# Altium PCB 2Motor16servoV3.PcbDoc (part 3 of 3)
Units mil, origin at the board's own origin, x right, y up, seen from the top; angles counter-clockwise.
Board outline 6000 x 4000 mil, 2 copper layers (Top Layer, Bottom Layer); 79 components, 93 nets, 290 pads, 78 vias.
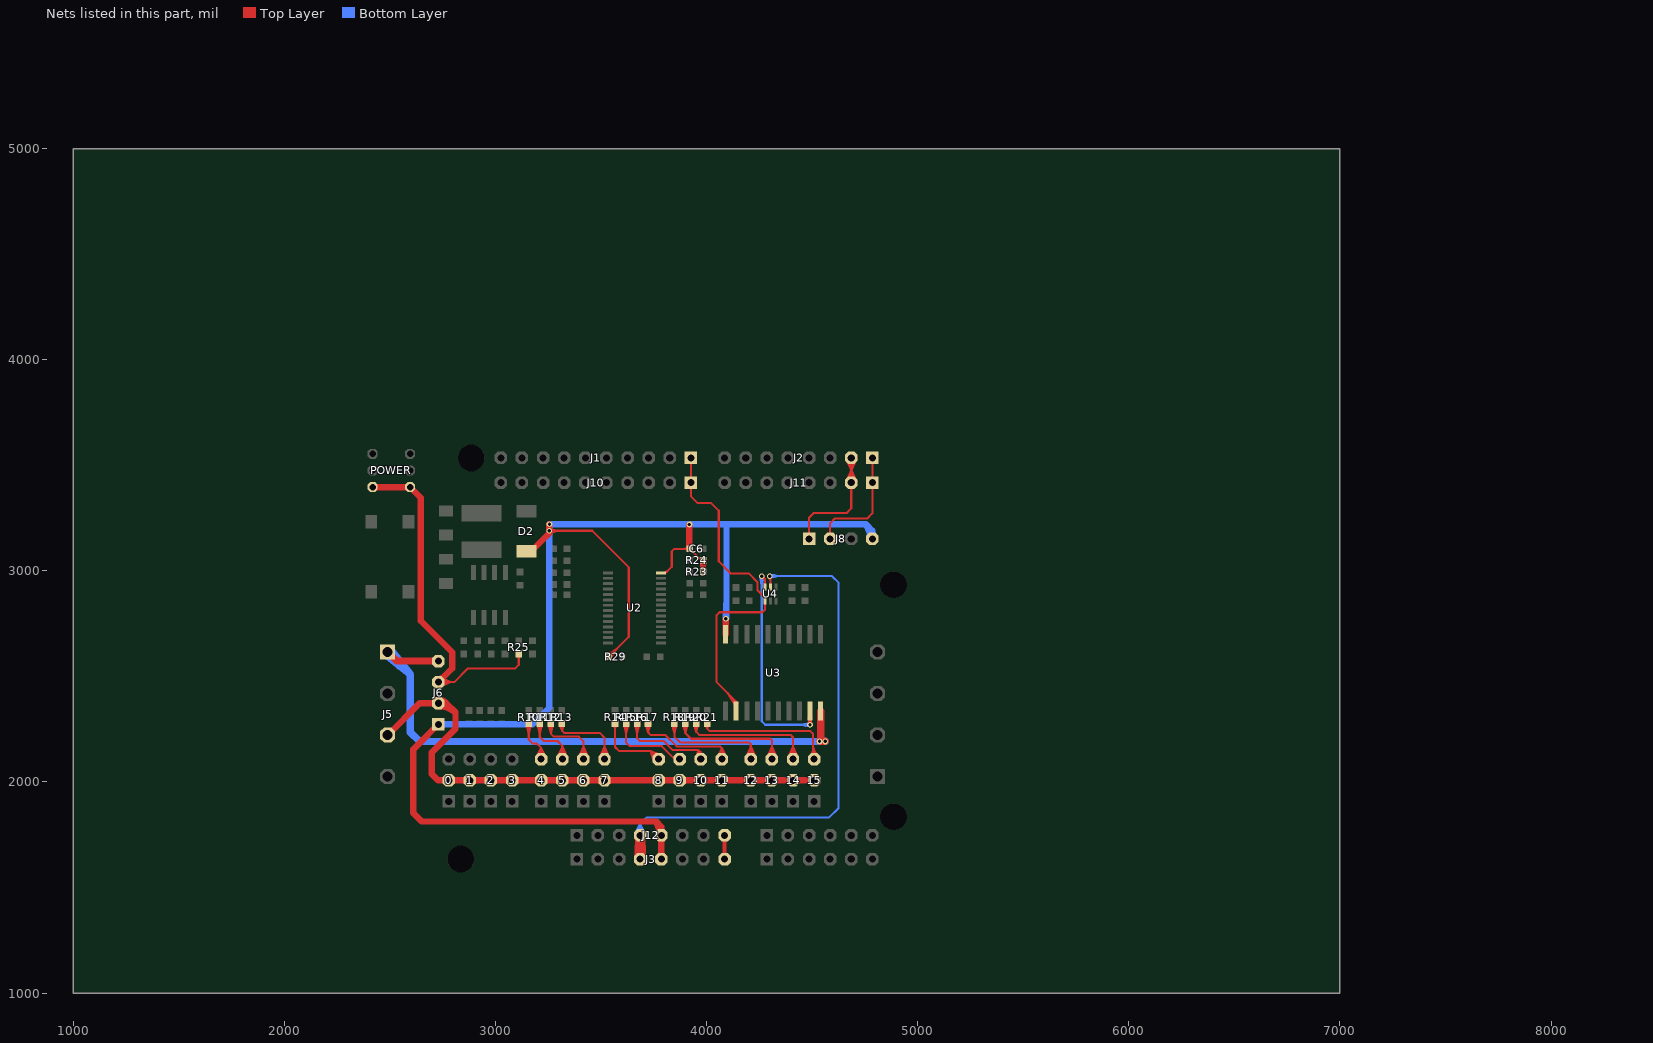
[diagram p3: the nets of this part, all layers, seen from the top]

## Via types
v1: diameter 23.62, hole 11.81, Top Layer to Bottom Layer, tented both sides, 50 vias
v2: diameter 27.56, hole 15.75, Top Layer to Bottom Layer, tented both sides, 28 vias

## Nets (pads, with @x,y where several pads share a name; then routed paths per layer and width w, separated by ;. In a path a pad name is that pad's centre, name@x,y a point inside that pad or via, vN(x,y) a via of type N, cw(c..) or ccw(c..) an arc to the next point about the centre after c; other vN are vias at no path point) (continued)
PWM4: 4.3 R10.2 | length 839.7
  Top Layer w10: R10.2@3146.33,2274.34 3157,2229.85 ; R10.2@3149.55,2260.91 cw(c3161.07,2263.68) R10.2@3157.24,2274.89 ; 3152.11,2250.23 cw(c3164.63,2253.24) R10.2@3160.47,2265.43 ; R10.2@3153.53,2265.43 cw(c3149.37,2253.24) 3161.89,2250.23 ; R10.2@3156.76,2274.89 cw(c3152.93,2263.68) R10.2@3164.45,2260.91 ; R10.2@3167.67,2274.34 3157,2229.85 ; 4.3@3192.11,2113.57 3216,2162 ; 4.3@3199.86,2126.47 ccw(c3168.82,2162) 3216,2162 ; 4.3@3201.6,2109.95 3216,2162 ; 4.3@3206.44,2118.94 ccw(c3188.06,2139.98) 3216,2139.98 ccw(c3243.94,2139.98) 4.3@3225.56,2118.94 ; 4.3@3216,2108 3216,2162 ; 4.3@3230.4,2109.95 3216,2162 ; 4.3@3232.14,2126.47 cw(c3263.18,2162) 3216,2162 ; 4.3@3239.89,2113.57 3216,2162 ; 3157,2229.85 R10.2@3157,2275.6 3157,2201 3176,2182 3196,2182 3216,2162 ; 3157,2249.65 cw(c3182.95,2249.65) 3164.6,2268 ccw(c3182.95,2249.65) 3157,2249.65 ; 3157,2249.65 ccw(c3131.05,2249.65) 3149.4,2268 cw(c3131.05,2249.65) 3157,2249.65
PWM5: 5.3 R11.2 | length 927.3
  Top Layer w10: R11.2@3198.66,2274.34 3209.33,2229.85 ; R11.2@3201.88,2260.91 cw(c3213.4,2263.68) R11.2@3209.57,2274.89 ; 3204.44,2250.23 cw(c3216.96,2253.24) R11.2@3212.81,2265.43 ; R11.2@3205.86,2265.43 cw(c3201.7,2253.24) 3214.22,2250.23 ; R11.2@3209.09,2274.89 cw(c3205.26,2263.68) R11.2@3216.79,2260.91 ; R11.2@3220.01,2274.34 3209.33,2229.85 ; 5.3@3292,2113.05 3316,2167.53 ; 5.3@3298.66,2125.34 ccw(c3256.79,2167.21) 3316,2167.21 ccw(c3375.21,2167.21) 5.3@3333.34,2125.34 ; 5.3@3301.58,2109.77 3316,2167.53 ; 5.3@3305.73,2118.27 ccw(c3280.93,2143.07) 3316,2143.07 ccw(c3351.07,2143.07) 5.3@3326.27,2118.27 ; 5.3@3316,2108 3316,2171 3293,2194 3229,2194 3209.33,2213.67 R11.2@3209.33,2275.6 3209.33,2229.85 ; 5.3@3330.42,2109.77 3316,2167.53 ; 5.3@3340,2113.05 3316,2167.53 ; 3209.33,2249.65 cw(c3235.28,2249.65) 3216.93,2268 ccw(c3235.28,2249.65) 3209.33,2249.65 ; 3209.33,2249.65 ccw(c3183.39,2249.65) 3201.73,2268 cw(c3183.39,2249.65) 3209.33,2249.65
PWM6: 6.3 R12.2 | length 978.7
  Top Layer w10: R12.2@3250.99,2274.34 3261.67,2229.85 ; R12.2@3254.21,2260.91 cw(c3265.74,2263.68) R12.2@3261.91,2274.89 ; 3256.78,2250.23 cw(c3269.3,2253.24) R12.2@3265.14,2265.43 ; R12.2@3258.19,2265.43 cw(c3254.04,2253.24) 3266.56,2250.23 ; R12.2@3261.43,2274.89 cw(c3257.6,2263.68) R12.2@3269.12,2260.91 ; R12.2@3272.34,2274.34 3261.67,2229.85 ; 6.3@3392,2113.05 3416,2167.53 ; 6.3@3398.66,2125.34 ccw(c3356.79,2167.21) 3416,2167.21 ccw(c3475.21,2167.21) 6.3@3433.34,2125.34 ; 6.3@3401.58,2109.77 3416,2167.53 ; 6.3@3405.73,2118.27 ccw(c3380.93,2143.07) 3416,2143.07 ccw(c3451.07,2143.07) 6.3@3426.27,2118.27 ; 6.3@3416,2108 3416,2193 3394,2215 3276,2215 3261.67,2229.33 R12.2@3261.67,2275.6 3261.67,2229.85 ; 6.3@3430.42,2109.77 3416,2167.53 ; 6.3@3440,2113.05 3416,2167.53 ; 3261.67,2249.65 cw(c3287.61,2249.65) 3269.27,2268 ccw(c3287.61,2249.65) 3261.67,2249.65 ; 3261.67,2249.65 ccw(c3235.72,2249.65) 3254.07,2268 cw(c3235.72,2249.65) 3261.67,2249.65
PWM7: 7.3 R13.2 | length 912.2
  Top Layer w10: R13.2@3303.41,2273.77 3314,2244 ; R13.2@3324.59,2273.77 3314,2244 ; 7.3@3492,2113.05 3516,2167.53 ; 7.3@3498.66,2125.34 ccw(c3456.79,2167.21) 3516,2167.21 ccw(c3575.21,2167.21) 7.3@3533.34,2125.34 ; 7.3@3501.58,2109.77 3516,2167.53 ; 7.3@3505.73,2118.27 ccw(c3480.93,2143.07) 3516,2143.07 ccw(c3551.07,2143.07) 7.3@3526.27,2118.27 ; 7.3@3516,2108 3516,2210 3493,2233 3325,2233 3314,2244 ; 7.3@3530.42,2109.77 3516,2167.53 ; 7.3@3540,2113.05 3516,2167.53 ; 3314,2244 R13.2@3314,2275.6 3314,2244 ; 3314,2249.65 cw(c3339.95,2249.65) 3321.6,2268 ccw(c3339.95,2249.65) 3314,2249.65 ; 3314,2249.65 ccw(c3288.05,2249.65) 3306.4,2268 cw(c3288.05,2249.65) 3314,2249.65
PWM8: 8.3 R14.2 | length 1237.9
  Top Layer w10: R14.2@3558.4,2268 cw(c3540.05,2249.65) 3566,2249.65 cw(c3591.95,2249.65) R14.2@3573.6,2268 ; R14.2@3566,2275.6 3566,2166 3586,2146 3734,2146 ; 3734.46,2144.62 ccw(c3780,2159.96) 8.3@3772.69,2112.47 ; 3735.38,2145.54 cw(c3720.04,2100) 8.3@3767.53,2107.31 ; 3737.37,2140.03 ccw(c3767.68,2157.15) 8.3@3770.73,2122.47 ; 3739.71,2129.05 ccw(c3777.18,2141.67) 8.3@3771.17,2102.59 ; 3739.97,2142.63 cw(c3722.85,2112.32) 8.3@3757.53,2109.27 ; 3745.01,2126.51 ccw(c3769.18,2140.16) 8.3@3771.6,2112.51 ; 3750.95,2140.29 cw(c3738.33,2102.82) 8.3@3777.41,2108.83 ; 8.3@3751.16,2095.07 3734,2146 ; 3753.49,2134.99 cw(c3739.84,2110.82) 8.3@3767.49,2108.4 ; 8.3@3760.43,2099.21 3734,2146 ; 8.3@3780.79,2119.57 3734,2146 ; 8.3@3784.93,2128.84 3734,2146 ; 3734,2146 cw(c3701.05,2113.04) 3747.53,2109.74 ccw(c3701.05,2113.04) 3734,2146 ; 3734,2146 ccw(c3766.96,2178.95) 3770.26,2132.47 cw(c3766.96,2178.95) 3734,2146 ; 3734,2146 8.3@3772,2108 3734,2146 ; 3749.49,2130.51 cw(c3729.98,2110.99) 3757.51,2109.03 ccw(c3729.98,2110.99) 3749.49,2130.51 ; 3749.49,2130.51 ccw(c3769.01,2150.02) 3770.97,2122.49 cw(c3769.01,2150.02) 3749.49,2130.51
PWM9: 9.3 R15.2 | length 666.9
  Top Layer w10: R15.2@3607.99,2274.34 3618.67,2229.85 ; R15.2@3611.21,2260.91 cw(c3622.74,2263.68) R15.2@3618.91,2274.89 ; 3613.78,2250.23 cw(c3626.3,2253.24) R15.2@3622.14,2265.43 ; R15.2@3615.2,2265.43 cw(c3611.04,2253.24) 3623.56,2250.23 ; R15.2@3618.43,2274.89 cw(c3614.6,2263.68) R15.2@3626.12,2260.91 ; R15.2@3629.34,2274.34 3618.67,2229.85 ; 9.3@3872,2108 3849,2108 3787,2170 3635,2170 3618.67,2186.33 R15.2@3618.67,2275.6 3618.67,2229.85 ; 3618.67,2249.65 cw(c3644.61,2249.65) 3626.27,2268 ccw(c3644.61,2249.65) 3618.67,2249.65 ; 3618.67,2249.65 ccw(c3592.72,2249.65) 3611.07,2268 cw(c3592.72,2249.65) 3618.67,2249.65
PWM10: 10.3 R16.2 | length 1346.9
  Top Layer w10: R16.2@3659.66,2274.34 3670.33,2229.85 ; R16.2@3662.88,2260.91 cw(c3674.4,2263.68) R16.2@3670.58,2274.89 ; 3665.44,2250.23 cw(c3677.96,2253.24) R16.2@3673.81,2265.43 ; R16.2@3666.86,2265.43 cw(c3662.7,2253.24) 3675.22,2250.23 ; R16.2@3670.09,2274.89 cw(c3666.26,2263.68) R16.2@3677.79,2260.91 ; R16.2@3681.01,2274.34 3670.33,2229.85 ; 10.3@3947.51,2109.3 3962,2151 ; 10.3@3954.66,2125.35 ccw(c3935.25,2144.78) 3962,2151 ; 10.3@3957.5,2107.08 3962,2151 ; 10.3@3979.9,2131.22 cw(c3988.75,2157.22) 3962,2151 ; 10.3@3985.42,2113.57 3962,2151 ; 10.3@3993.41,2119.97 3962,2151 ; 3670.33,2229.85 R16.2@3670.33,2275.6 3670.33,2206.67 3682.53,2194.47 3796.53,2194.47 3840,2151 3962,2151 ; 3670.33,2249.65 cw(c3696.28,2249.65) 3677.93,2268 ccw(c3696.28,2249.65) 3670.33,2249.65 ; 3670.33,2249.65 ccw(c3644.39,2249.65) 3662.73,2268 cw(c3644.39,2249.65) 3670.33,2249.65 ; 3962,2151 10.3@3972,2108 ; 3962,2151 3972,2141 ; 10.3@3972,2108 3972,2141 ; 10.3@3972,2108 3972,2141 ; 3972,2141 cw(c3962.07,2141) 3964.93,2131.49 ccw(c3962.07,2141) 3972,2141 ; 3972,2141 ccw(c3981.93,2141) 3979.07,2131.49 cw(c3981.93,2141) 3972,2141 ; 3972,2141 3986.17,2111.2 3972,2141 ; 3972,2141 3957.83,2111.2 3972,2141 ; 3972,2141 3994.77,2117.12 3972,2141 ; 3972,2141 3949.23,2117.12 3972,2141
PWM11: 11.3 R17.2 | length 1005.3
  Top Layer w10: R17.2@3711.35,2274.18 3722,2235 ; R17.2@3732.65,2274.18 3722,2235 ; 11.3@4048.16,2113.78 4072,2160 ; 11.3@4056.4,2126.93 ccw(c4029.15,2160) 4072,2160 ; 11.3@4057.61,2110.03 4072,2160 ; 11.3@4062.76,2119.21 ccw(c4046.62,2138.8) 4072,2138.8 ccw(c4097.38,2138.8) 11.3@4081.24,2119.21 ; 11.3@4072,2108 4072,2160 ; 11.3@4086.39,2110.03 4072,2160 ; 11.3@4087.6,2126.93 cw(c4114.85,2160) 4072,2160 ; 11.3@4095.84,2113.78 4072,2160 ; 3722,2235 R17.2@3722,2275.6 3722,2235 ; 3722,2235 3735.2,2221.8 3805.2,2221.8 3858,2169 4063,2169 4072,2160 ; 3722,2249.65 cw(c3747.95,2249.65) 3729.6,2268 ccw(c3747.95,2249.65) 3722,2249.65 ; 3722,2249.65 ccw(c3696.05,2249.65) 3714.4,2268 cw(c3696.05,2249.65) 3722,2249.65
PWM12: 12.3 R18.2 | length 1186.5
  Top Layer w10: R18.2@3836.33,2274.34 3847,2229.85 ; R18.2@3839.55,2260.91 cw(c3851.07,2263.68) R18.2@3847.24,2274.89 ; 3842.11,2250.23 cw(c3854.63,2253.24) R18.2@3850.47,2265.43 ; R18.2@3843.53,2265.43 cw(c3839.37,2253.24) 3851.89,2250.23 ; R18.2@3846.76,2274.89 cw(c3842.93,2263.68) R18.2@3854.45,2260.91 ; R18.2@3857.67,2274.34 3847,2229.85 ; 12.3@4185,2113.05 4209,2167.53 ; 12.3@4191.66,2125.34 ccw(c4149.79,2167.21) 4209,2167.21 ccw(c4268.21,2167.21) 12.3@4226.34,2125.34 ; 12.3@4194.58,2109.77 4209,2167.53 ; 12.3@4198.73,2118.27 ccw(c4173.93,2143.07) 4209,2143.07 ccw(c4244.07,2143.07) 12.3@4219.27,2118.27 ; 12.3@4209,2108 4209,2179 4201,2187 3875,2187 3847,2215 R18.2@3847,2275.6 3847,2229.85 ; 12.3@4223.42,2109.77 4209,2167.53 ; 12.3@4233,2113.05 4209,2167.53 ; 3847,2249.65 cw(c3872.95,2249.65) 3854.6,2268 ccw(c3872.95,2249.65) 3847,2249.65 ; 3847,2249.65 ccw(c3821.05,2249.65) 3839.4,2268 cw(c3821.05,2249.65) 3847,2249.65
PWM13: 13.3 R19.2 | length 1224.9
  Top Layer w10: R19.2@3888,2274.26 3898.67,2232.33 ; R19.2@3891.26,2261.44 cw(c3902.08,2264.19) R19.2@3898.88,2274.88 ; 3893.83,2251.34 cw(c3905.07,2254.19) R19.2@3901.75,2265.3 ; R19.2@3895.59,2265.3 cw(c3892.27,2254.19) 3903.5,2251.34 ; R19.2@3898.45,2274.88 cw(c3895.26,2264.19) R19.2@3906.07,2261.44 ; R19.2@3909.33,2274.26 3898.67,2232.33 ; 13.3@4285,2113.05 4309,2167.53 ; 13.3@4291.66,2125.34 ccw(c4249.79,2167.21) 4309,2167.21 ccw(c4368.21,2167.21) 13.3@4326.34,2125.34 ; 13.3@4294.58,2109.77 4309,2167.53 ; 13.3@4298.73,2118.27 ccw(c4273.93,2143.07) 4309,2143.07 ccw(c4344.07,2143.07) 13.3@4319.27,2118.27 ; 13.3@4309,2108 4309,2198 4302,2205 3926,2205 3898.67,2232.33 ; 13.3@4323.42,2109.77 4309,2167.53 ; 13.3@4333,2113.05 4309,2167.53 ; 3898.67,2232.33 R19.2@3898.67,2275.6 3898.67,2232.33 ; 3898.67,2249.65 cw(c3924.61,2249.65) 3906.27,2268 ccw(c3924.61,2249.65) 3898.67,2249.65 ; 3898.67,2249.65 ccw(c3872.72,2249.65) 3891.07,2268 cw(c3872.72,2249.65) 3898.67,2249.65
PWM14: 14.3 R20.2 | length 1192.2
  Top Layer w10: R20.2@3939.69,2274.08 3950.33,2237.67 ; R20.2@3960.97,2274.08 3950.33,2237.67 ; 14.3@4385,2113.05 4409,2167.53 ; 14.3@4391.66,2125.34 ccw(c4349.79,2167.21) 4409,2167.21 ccw(c4468.21,2167.21) 14.3@4426.34,2125.34 ; 14.3@4394.58,2109.77 4409,2167.53 ; 14.3@4398.73,2118.27 ccw(c4373.93,2143.07) 4409,2143.07 ccw(c4444.07,2143.07) 14.3@4419.27,2118.27 ; 14.3@4409,2108 4409,2211 4397,2223 4360,2223 3965,2223 3950.33,2237.67 ; 14.3@4423.42,2109.77 4409,2167.53 ; 14.3@4433,2113.05 4409,2167.53 ; 3950.33,2237.67 R20.2@3950.33,2275.6 3950.33,2237.67 ; 3950.33,2249.65 cw(c3976.28,2249.65) 3957.93,2268 ccw(c3976.28,2249.65) 3950.33,2249.65 ; 3950.33,2249.65 ccw(c3924.39,2249.65) 3942.73,2268 cw(c3924.39,2249.65) 3950.33,2249.65
PWM15: 15.3 R21.2 | length 924.3
  Top Layer w10: R21.2@3991.56,2273.04 4002,2253 ; R21.2@4012.44,2273.04 4002,2253 ; 15.3@4491.66,2125.34 ccw(c4462.08,2154.92) 4503.91,2154.92 ; 4503.91,2155.36 ccw(c4556.36,2155.36) 15.3@4519.27,2118.27 ; 4503.91,2179.5 ccw(c4580.5,2179.5) 15.3@4526.34,2125.34 ; 15.3@4509,2108 4503.91,2113.09 4503.91,2228.09 4491,2241 4014,2241 4002,2253 ; 4002,2253 cw(c4020.38,2253) 4008.78,2267.26 ccw(c4020.38,2253) 4002,2253 ; 4002,2253 ccw(c3983.62,2253) 3995.22,2267.26 cw(c3983.62,2253) 4002,2253 ; 4002,2253 R21.2@4002,2275.6 4002,2253
RX33: J2.1 J8.2 J11.1 | length 555.5
  Top Layer w10: J8.2@4585,3152 4585,3226 4607,3248 4760,3248 4785,3273 J11.1@4785,3418 J2.1@4785,3535
TX33: J2.2 J8.1 J11.2 | length 1537.3
  Top Layer w10: J8.1@4485,3152 4485,3252 4507,3274 4663,3274 4685,3296 J11.2@4685,3418 J2.2@4685,3535 4685,3475.47 ; J11.2@4661,3423.05 4685,3477.53 ; J2.2@4661,3529.95 4685,3475.47 ; J11.2@4667.66,3435.34 ccw(c4625.79,3477.21) 4685,3477.21 ccw(c4744.21,3477.21) J11.2@4702.34,3435.34 ; J11.2@4670.58,3419.77 4685,3477.53 ; J2.2@4670.58,3533.23 4685,3475.47 ; J11.2@4674.73,3428.27 ccw(c4649.93,3453.07) 4685,3453.07 ccw(c4720.07,3453.07) J11.2@4695.27,3428.27 ; J11.2@4699.42,3419.77 4685,3477.53 ; J2.2@4699.42,3533.23 4685,3475.47 ; J11.2@4709,3423.05 4685,3477.53 ; J2.2@4709,3529.95 4685,3475.47 ; 4685,3475.79 cw(c4744.21,3475.79) 4702.34,3517.66 ccw(c4744.21,3475.79) 4685,3475.79 ; 4685,3475.79 ccw(c4625.79,3475.79) 4667.66,3517.66 cw(c4625.79,3475.79) 4685,3475.79 ; 4685,3499.93 cw(c4720.07,3499.93) 4695.27,3524.73 ccw(c4720.07,3499.93) 4685,3499.93 ; 4685,3499.93 ccw(c4649.93,3499.93) 4674.73,3524.73 cw(c4649.93,3499.93) 4685,3499.93
TX33/DIRA: J1.1 J10.1 U3.2 U4.1 | length 2099.6
  Top Layer w10: J1.1@3925,3535 J10.1@3925,3418 3925,3353 3957,3321 4021,3321 4057,3285 4057,3045 4115,2987 4201,2987 4241,2947 4241,2908 4260,2889 ; 4116.69,2392.54 ccw(c4150.21,2413.74) U3.2@4141.5,2375.04 ; 4120.17,2399.83 cw(c4088.73,2368.39) U3.2@4133.19,2368.39 ; 4122.16,2396.82 cw(c4093.53,2369.36) U3.2@4133.19,2368.54 ; U3.2@4133.24,2369.22 ccw(c4116.92,2371.21) 4129.86,2381.34 ccw(c4142.81,2391.48) U3.2@4140.82,2375.15 ; U3.2@4134.43,2364.47 4098.16,2421.84 ; 4137.24,2382.76 cw(c4122.87,2368.39) U3.2@4143.19,2368.39 ; U3.2@4140,2335.91 4140,2380 4047,2473 4047,2790 4061,2804 4264,2804 4276.41,2816.41 ; U3.2@4140,2368.39 4098.16,2421.84 ; U3.2@4145.15,2372.86 4098.16,2421.84 ; 4269.49,2879.51 cw(c4257.34,2867.36) U4.1@4274.52,2867.36 ; U4.1@4276.41,2847.68 4276.41,2816.41 ; U4.1@4276.41,2867.36 4260,2889 ; 4260,2889 4276.41,2872.59 U4.1@4276.41,2857.52 4276.41,2816.41
TX33/DIRA#: U3.9 U4.6 | length 1730.7
  Top Layer w10: v2@4261,2966.22 cw(c4261,2945.02) 4275.99,2960.01 cw(c4290.98,2975) v2@4269.78,2975 ; v2(4261,2975) 4276.41,2959.59 ; U4.6@4276.41,2924.45 4276.41,2959.59 ; U4.6@4276.41,2934.29 4276.41,2959.59 ; v2@4482.13,2275.91 ccw(c4464.56,2287.76) 4485.36,2291.81 ccw(c4506.17,2295.85) v2@4494.32,2278.28 ; v2@4483.2,2277.21 ccw(c4468.21,2292.2) 4489.41,2292.2 ccw(c4510.6,2292.2) v2@4495.62,2277.21 ; U3.9@4483.21,2302.84 v2(4489.41,2271) ; v2@4483.32,2277.32 ccw(c4468.6,2292.58) 4489.8,2292.19 ccw(c4510.99,2291.81) v2@4495.73,2277.09 ; v2@4484.77,2278.45 ccw(c4473.57,2296.45) 4494.21,2291.64 ccw(c4514.86,2286.84) v2@4496.86,2275.64 ; U3.9@4485.1,2298.71 cw(c4473.26,2287.29) 4489.7,2286.99 cw(c4506.14,2286.69) U3.9@4494.73,2298.53 ; U3.9@4485.18,2298.62 cw(c4474.98,2288.42) 4489.41,2288.42 ; 4486.21,2287.44 cw(c4494.29,2289.01) U3.9@4491.94,2296.91 ; U3.9@4486.71,2297.47 cw(c4480.99,2287.1) 4492.53,2284.41 ; 4489.41,2285.56 cw(c4507.87,2285.56) U3.9@4494.82,2298.62 ; U3.9@4490,2303.43 v2(4489.41,2271) ; U3.9@4490,2335.91 4489.41,2335.32 v2(4489.41,2271) ; U3.9@4496.76,2302.59 v2(4489.41,2271)
  Bottom Layer w10: v2@4252.26,2974.12 4261,2931.22 v2@4269.74,2974.12 ; v2@4254.79,2968.79 cw(c4239.8,2953.8) 4261,2953.8 cw(c4282.2,2953.8) v2@4267.21,2968.79 ; 4256.9,2951.37 cw(c4270.83,2954.21) v2@4264.75,2967.06 ; v2@4257.25,2967.06 cw(c4251.17,2954.21) 4265.1,2951.37 ; v2(4261,2975) 4261,2287 4277,2271 4289,2271 v2(4489.41,2271) ; 4465.78,2266.9 ccw(c4468.62,2280.83) v2@4481.47,2274.75 ; 4465.78,2275.1 cw(c4468.62,2261.17) v2@4481.47,2267.25 ; v2@4483.2,2264.79 ccw(c4468.21,2249.8) 4468.21,2271 ccw(c4468.21,2292.2) v2@4483.2,2277.21 ; v2@4488.53,2262.26 4445.63,2271 v2@4488.53,2279.74
VCC5V: 
VCC33: J3.4 J12.4 U4.5 | length 7061
  Top Layer w10: v2(4299,2975) 4302,2972 U4.5@4302,2924.45 ; U4.5@4302,2934.29 v2@4302,2971.18 ; v2@4292.79,2968.79 cw(c4270.56,2946.56) 4302,2946.56 ccw(c4270.56,2946.56) v2@4292.79,2968.79 ; 4302,2961.05 cw(c4312.95,2961.05) 4305.21,2968.79 ccw(c4312.95,2961.05) 4302,2961.05
  Top Layer w20: J3.4@3665.5,1633.88 J12.4@3670.09,1724.61 ; J12.4@3665.59,1744.87 J3.4@3685,1657.47 ; J3.4@3666.19,1640.26 J12.4@3699.91,1724.61 ; 3667.2,1667.43 cw(c3761.21,1662.68) J12.4@3698.09,1732.51 ; 3667.92,1681.65 ccw(c3732.98,1678.36) 3684.65,1634.68 cw(c3715.62,1658.56) 3679.31,1673.07 ; J12.4@3668.38,1736.75 cw(c3597.24,1692.9) J3.4@3674.84,1661.88 ; J3.4@3668.53,1645.49 ccw(c3614.72,1679.73) 3676.98,1693.56 ; J3.4@3669.11,1646.35 ccw(c3630.76,1673.77) 3677.26,1681.5 ccw(c3723.77,1689.24) J3.4@3696.35,1650.89 ; J3.4@3669.52,1646.91 ccw(c3622.04,1683.43) 3677.66,1705.66 ; 3669.64,1715.65 cw(c3715.42,1713.34) J12.4@3684.68,1747.35 ; J12.4@3670.35,1729.87 ccw(c3783.64,1724.15) J3.4@3699.49,1648.09 ; J3.4@3670.51,1648.09 ccw(c3586.36,1724.15) J12.4@3699.65,1729.87 ; J12.4@3670.89,1721.02 cw(c3693.41,1726.02) J12.4@3684.82,1747.44 ; J12.4@3671.27,1717.53 cw(c3700.38,1722.37) J12.4@3684.75,1747.4 ; J12.4@3671.91,1732.51 cw(c3608.79,1662.68) 3702.8,1667.43 ; J3.4@3673.65,1650.89 ccw(c3646.23,1689.24) 3692.74,1681.5 ccw(c3739.24,1673.77) J3.4@3700.89,1646.35 ; J3.4@3674.51,1651.47 ccw(c3658.13,1677.21) 3687.91,1670.6 ; J12.4@3674.66,1730.44 cw(c3652.46,1694.87) 3693.82,1687.98 ; 3675.99,1698.03 cw(c3702.29,1703.87) J12.4@3692.27,1728.87 ; 3676.18,1687.98 cw(c3717.54,1694.87) J12.4@3695.34,1730.44 ; J12.4@3677.73,1728.87 cw(c3667.71,1703.87) 3694.01,1698.03 ; 3680.42,1698.78 cw(c3730.65,1718.86) J12.4@3684.6,1747.25 ; 3682.09,1670.6 ccw(c3711.87,1677.21) J3.4@3695.49,1651.47 ; J12.4@3685.18,1747.44 cw(c3676.59,1726.02) J12.4@3699.11,1721.02 ; J12.4@3685.25,1747.4 cw(c3669.62,1722.37) J12.4@3698.73,1717.53 ; J12.4@3685.32,1747.35 cw(c3654.58,1713.34) 3700.36,1715.65 ; J12.4@3685.4,1747.25 cw(c3639.35,1718.86) 3689.58,1698.78 ; 3690.69,1673.07 cw(c3654.38,1658.56) 3685.37,1634.71 ccw(c3637.02,1678.36) 3702.08,1681.65 ; 3692.34,1705.66 ccw(c3747.96,1683.43) J3.4@3700.48,1646.91 ; 3693.02,1693.56 ccw(c3755.28,1679.73) J3.4@3701.47,1645.49 ; J3.4@3695.16,1661.88 cw(c3772.76,1692.9) J12.4@3701.62,1736.75 ; J3.4@3703.81,1640.26 J12.4@3670.09,1724.61 ; J12.4@3704.41,1744.87 J3.4@3685,1657.47 ; J3.4@3704.5,1633.88 J12.4@3699.91,1724.61 ; J12.4@3670.09,1724.61 J3.4@3685,1635 ; J3.4@3671.19,1648.81 ccw(c3637.86,1682.14) 3685,1682.14 ; J3.4@3671.19,1648.81 ccw(c3637.86,1682.14) 3685,1682.14 ; J3.4@3671.19,1648.81 ccw(c3637.86,1682.14) 3685,1682.14 ; J12.4@3671.19,1733.19 cw(c3637.86,1699.86) 3685,1699.86 ; J12.4@3671.19,1733.19 cw(c3637.86,1699.86) 3685,1699.86 ; J12.4@3671.19,1733.19 cw(c3637.86,1699.86) 3685,1699.86 ; J3.4@3685,1635 J12.4@3685,1724.53 ; J3.4@3685,1635 J12.4@3699.91,1724.61 ; J3.4@3685,1635 J12.4@3685,1747 J3.4@3685,1657.47 ; 3685,1682.14 ccw(c3732.14,1682.14) J3.4@3698.81,1648.81 ; 3685,1682.14 ccw(c3732.14,1682.14) J3.4@3698.81,1648.81 ; 3685,1682.14 ccw(c3732.14,1682.14) J3.4@3698.81,1648.81 ; 3685,1699.86 cw(c3732.14,1699.86) J12.4@3698.81,1733.19 ; 3685,1699.86 cw(c3732.14,1699.86) J12.4@3698.81,1733.19 ; 3685,1699.86 cw(c3732.14,1699.86) J12.4@3698.81,1733.19 ; J12.4@3685,1724.53 3704.41,1637.13 J12.4@3685,1724.53 ; J12.4@3685,1724.53 3665.59,1637.13 J12.4@3685,1724.53 ; J12.4@3668.53,1736.51 cw(c3614.72,1702.27) 3676.98,1688.44 ccw(c3614.72,1702.27) J12.4@3668.53,1736.51 ; J3.4@3670.89,1660.98 ccw(c3693.41,1655.98) 3684.82,1634.56 cw(c3693.41,1655.98) J3.4@3670.89,1660.98 ; J12.4@3674.51,1730.53 cw(c3658.13,1704.79) 3687.91,1711.4 ccw(c3658.13,1704.79) J12.4@3674.51,1730.53 ; 3675.99,1683.97 ccw(c3702.29,1678.13) 3692.27,1653.13 cw(c3702.29,1678.13) 3675.99,1683.97 ; J3.4@3677.73,1653.13 ccw(c3667.71,1678.13) 3694.01,1683.97 cw(c3667.71,1678.13) J3.4@3677.73,1653.13 ; 3682.09,1711.4 cw(c3711.87,1704.79) 3695.49,1730.53 ccw(c3711.87,1704.79) 3682.09,1711.4 ; J3.4@3685.18,1634.56 ccw(c3676.59,1655.98) 3699.11,1660.98 cw(c3676.59,1655.98) J3.4@3685.18,1634.56 ; 3693.02,1688.44 cw(c3755.28,1702.27) 3701.47,1736.51 ccw(c3755.28,1702.27) 3693.02,1688.44
  Bottom Layer w10: J12.4@3661.09,1752.47 3685,1802 ; J12.4@3668.61,1765.25 ccw(c3635.61,1802) 3685,1802 ; J12.4@3670.6,1748.92 3685,1802 ; J12.4@3675.29,1757.81 ccw(c3655.74,1779.57) 3685,1779.57 ccw(c3714.26,1779.57) J12.4@3694.71,1757.81 ; J12.4@3685,1747 3685,1802 ; J12.4@3699.4,1748.92 3685,1802 ; J12.4@3701.39,1765.25 cw(c3734.39,1802) 3685,1802 ; J12.4@3708.91,1752.47 3685,1802 ; v2(4299,2975) 4594,2975 4625,2944 4625,2907 4625,1877 4579,1831 3714,1831 3685,1802 ; v2@4299.88,2966.26 4342.78,2975 v2@4299.88,2983.74 ; v2@4305.21,2968.79 cw(c4320.2,2953.8) 4320.2,2975 cw(c4320.2,2996.2) v2@4305.21,2981.21 ; v2@4306.94,2971.25 cw(c4319.79,2965.17) 4322.63,2979.1 ; v2@4306.94,2978.75 ccw(c4319.79,2984.83) 4322.63,2970.9
VCC50: C6.2 D2.2 J3.5 J6.1 J8.4 J12.5 R23.2 R24.2 R29.2 U2.28 U3.20 | length 11385.4
  Top Layer w10: v2@3255.29,3181.26 3298.19,3190 ; v2@3255.29,3198.74 3298.19,3190 ; v2@3262.35,3186.25 cw(c3275.2,3180.17) 3278.04,3194.1 ; v2@3262.35,3193.75 ccw(c3275.2,3199.83) 3278.04,3185.9 ; R29.2@3529.82,2601.34 3573.56,2629.96 R29.2@3544.94,2586.22 ; R29.2@3534.4,2603.52 ccw(c3521.63,2664.65) 3573.88,2630.46 ; R29.2@3536.45,2593.73 ccw(c3528.61,2631.23) 3560.67,2610.26 ; R29.2@3536.6,2593 3631,2687.4 3631,3017 3458,3190 3255,3190 v2(3254.41,3190) 3298.19,3190 ; R29.2@3536.6,2603.75 ccw(c3536.6,2629.7) 3554.95,2611.35 ccw(c3573.29,2593) R29.2@3547.35,2593 ; R29.2@3537.33,2592.85 cw(c3574.83,2585.01) 3553.85,2617.07 ; R29.2@3547.12,2590.8 cw(c3608.25,2578.03) 3574.06,2630.29 ; U2.28@3783,2990.68 3805.68,2990.68 3834.48,3019.48 3834.48,3092.48 3846.59,3104.59 C6.2@3920.6,3104.59 3974.99,3050.19 R24.2@3983.4,3050.19 ; U2.28@3799.73,2992.57 ccw(c3799.73,3011.48) 3813.11,2998.11 ; C6.2@3913,3096.99 ccw(c3894.65,3078.64) 3894.65,3104.59 ccw(c3894.65,3130.54) C6.2@3913,3112.19 ; R24.2@3972.68,3051 R23.2@3974.59,3004.81 ; R23.2@3972.73,2997.06 3983.4,3041.54 R23.2@3994.08,2997.06 ; R24.2@3972.73,3048.93 R23.2@3983.4,3004.45 ; R24.2@3973.07,3041.72 ccw(c4027.76,3043.97) R23.2@3990.68,3003.7 ; R24.2@3973.16,3046.93 R23.2@3992.21,3004.81 ; 3973.87,3022.2 cw(c4012.09,3023.78) R24.2@3983.95,3049.69 ; 3974.06,3017.6 ccw(c4004.64,3018.86) R23.2@3983.91,2996.35 ; R23.2@3974.24,3001.41 ccw(c3946.24,3018.57) 3978.17,3026.24 ; R24.2@3974.24,3044.58 cw(c3946.24,3027.41) 3978.17,3019.75 ; R23.2@3974.47,3001.77 ccw(c3943.77,3022.3) R24.2@3977.42,3037.52 ; R24.2@3974.49,3044.18 cw(c3952.98,3029.67) 3978.45,3024.72 cw(c4003.93,3019.77) R24.2@3989.41,3041.28 ; R24.2@3974.9,3043.61 cw(c3951.55,3025.54) 3978.46,3013.37 ; R23.2@3975.95,3010.48 ccw(c3987.47,3007.72) R23.2@3983.64,2996.5 ; R24.2@3975.95,3035.51 cw(c3987.47,3038.27) R24.2@3983.64,3049.49 ; 3976,3012.09 ccw(c3990.12,3009.35) R23.2@3983.73,2996.47 ; R23.2@3976.12,3003.7 ccw(c3939.04,3043.97) R24.2@3993.74,3041.72 ; R24.2@3977.39,3041.28 cw(c3962.88,3019.77) 3988.35,3024.72 cw(c4013.82,3029.67) R24.2@3992.31,3044.18 ; R23.2@3977.78,3004.96 ccw(c3967.82,3021.21) 3986.36,3016.76 ; R24.2@3977.78,3041.03 cw(c3967.82,3024.78) 3986.36,3029.23 ; 3978.51,3021.16 ccw(c3991.03,3018.16) R23.2@3986.87,3005.97 ; 3978.51,3024.83 cw(c3991.03,3027.83) R24.2@3986.87,3040.02 ; 3978.5,3024.97 ccw(c3996.16,3021.54) R23.2@3988.17,3005.43 ; R23.2@3978.63,3005.43 ccw(c3970.64,3021.54) 3988.3,3024.97 ; R23.2@3979.93,3005.97 ccw(c3975.77,3018.16) 3988.29,3021.16 ; R24.2@3979.93,3040.02 cw(c3975.77,3027.83) 3988.29,3024.83 ; 3980.45,3016.76 ccw(c3998.98,3021.21) R23.2@3989.02,3004.96 ; 3980.45,3029.23 cw(c3998.98,3024.78) R24.2@3989.02,3041.03 ; 3981.5,3028.5 cw(c4000.38,3037.05) R24.2@3983.99,3049.74 ; 3981.97,3021.13 ccw(c4005.41,3010.52) R23.2@3984.02,2996.21 ; R23.2@3982.78,2996.21 ccw(c3961.39,3010.52) 3984.84,3021.13 ; R24.2@3982.81,3049.74 cw(c3966.42,3037.05) 3985.31,3028.5 ; R24.2@3982.85,3049.69 cw(c3954.71,3023.78) 3992.93,3022.2 ; R23.2@3982.89,2996.35 ccw(c3962.17,3018.86) 3992.74,3017.6 ; R23.2@3983.07,2996.47 ccw(c3976.68,3009.35) 3990.8,3012.09 ; R23.2@3983.16,2996.5 ccw(c3979.33,3007.72) R23.2@3990.85,3010.48 ; R24.2@3983.16,3049.49 cw(c3979.33,3038.27) R24.2@3990.85,3035.51 ; R23.2@3983.4,2995.8 R24.2@3983.4,3050.19 ; 3988.35,3013.37 cw(c4015.25,3025.54) R24.2@3991.9,3043.61 ; 3988.63,3019.75 cw(c4020.56,3027.41) R24.2@3992.57,3044.58 ; 3988.63,3026.24 ccw(c4020.56,3018.57) R23.2@3992.57,3001.41 ; R24.2@3989.39,3037.52 ccw(c4023.03,3022.3) R23.2@3992.34,3001.77 ; R24.2@3993.64,3046.93 R23.2@3974.59,3004.81 ; R24.2@3994.08,3048.93 R23.2@3983.4,3004.45 ; R24.2@3994.12,3051 R23.2@3992.21,3004.81 ; 3275.61,3190 cw(c3275.61,3211.2) 3260.62,3196.21 ccw(c3275.61,3211.2) 3275.61,3190 ; 3275.61,3190 ccw(c3275.61,3168.8) 3260.62,3183.79 cw(c3275.61,3168.8) 3275.61,3190 ; R23.2@3974.59,3004.81 R24.2@3983.4,3050.19 ; R23.2@3983.4,3004.45 R24.2@3983.4,3050.19 ; 3983.4,3021.74 cw(c3957.45,3021.74) 3975.8,3003.4 ccw(c3957.45,3021.74) 3983.4,3021.74 ; 3983.4,3021.74 ccw(c4009.35,3021.74) 3991,3003.4 cw(c4009.35,3021.74) 3983.4,3021.74 ; 3983.4,3024.25 cw(c4009.35,3024.25) 3991,3042.59 ccw(c4009.35,3024.25) 3983.4,3024.25 ; 3983.4,3024.25 ccw(c3957.45,3024.25) 3975.8,3042.59 cw(c3957.45,3024.25) 3983.4,3024.25 ; R24.2@3983.4,3050.19 R23.2@3992.21,3004.81
  Top Layer w30: 2635.83,2179.83 J6.1@2729,2273 2610,2154 2610,1853 2650,1813 3760,1813 ; D2.2@3165,3088.6 3255,3178.6 v2@3255,3190 ; 3248.02,3171.62 ccw(c3229.63,3190) v2@3255.63,3190 ; J12.5@3771.75,1752.97 ccw(c3739.78,1767.37) 3772.58,1779.8 ccw(c3805.37,1792.22) J12.5@3790.97,1760.25 ; v2(3918,3220) 3918,3107.19 C6.2@3920.6,3104.59 ; U3.20@4090,2700.09 4090,2772 U3.20@4090,2732.57 ; v2(3254.41,3190) v2(3255,3221) ; v2(3254.41,3190) v2(3255,3221) ; v2(3254.41,3190) v2(3255,3221) ; v2(3254.41,3190) 3254.41,3220.41 v2(3255,3221) ; v2@3255,3190 v2(3255,3221) ; v2@3255,3190 v2(3255,3221) ; 3760,1813 J12.5@3785,1747 ; 3760,1813 3785,1788 ; 3785,1670.07 cw(c3749.93,1670.07) 3774.73,1645.27 ccw(c3749.93,1670.07) 3785,1670.07 ; 3785,1670.07 ccw(c3820.07,1670.07) 3795.27,1645.27 cw(c3820.07,1670.07) 3785,1670.07 ; 3785,1711.93 cw(c3820.07,1711.93) 3795.27,1736.73 ccw(c3820.07,1711.93) 3785,1711.93 ; 3785,1711.93 ccw(c3749.93,1711.93) 3774.73,1736.73 cw(c3749.93,1711.93) 3785,1711.93 ; J12.5@3785,1747 3785,1788 ; J12.5@3785,1747 J3.5@3785,1635 J12.5@3785,1747 ; J12.5@3785,1747 3785,1788 ; 3785,1782.07 cw(c3749.93,1782.07) 3774.73,1757.27 ccw(c3749.93,1782.07) 3785,1782.07 ; 3785,1782.07 ccw(c3820.07,1782.07) 3795.27,1757.27 cw(c3820.07,1782.07) 3785,1782.07
  Bottom Layer w30: J6.1@2729,2273 3175,2273 3254,2352 3254,3204.41 ; J6.1@2739.27,2262.73 cw(c2764.07,2237.93) 2764.07,2273 cw(c2764.07,2308.07) J6.1@2739.27,2283.27 ; 3254,3086.21 v2(3254.41,3190) ; 3254,3117.19 v2(3255,3221) ; 3814.19,3221 v2(3918,3220) 4021.81,3221 ; 4093.78,2877.1 v2(4091,2773) 4093.78,2775.78 4093.78,3217.22 4090,3221 ; J8.4@4771.48,3157.32 ccw(c4738.85,3170.18) 4771.02,3184.16 ccw(c4803.18,3198.15) J8.4@4790.32,3165.52 ; 3254,3204.41 v2(3255,3221) ; 3254,3204.41 v2(3255,3221) ; 3254,3204.41 v2(3255,3221) ; 3254,3204.41 v2(3255,3221) ; 3254,3204.41 v2(3254.41,3190) ; 3254,3204.41 v2(3254.41,3190) ; 3254,3204.41 3254.41,3204.41 ; v2(3254.41,3190) v2(3255,3221) ; v2(3254.41,3190) v2(3255,3221) ; v2(3254.41,3190) v2(3255,3221) ; v2(3254.41,3190) v2(3255,3221) ; v2(3254.41,3190) v2(3255,3221) ; v2(3254.41,3190) v2(3255,3221) ; v2(3254.41,3190) 3254.41,3204.41 ; v2(3254.41,3190) 3255,3205 ; v2(3254.41,3190) v2(3255,3221) ; v2(3254.41,3190) 3254.41,3204.41 ; v2(3254.41,3190) 3255,3205 ; 3254.41,3204.41 v2(3255,3221) ; 3254.41,3204.41 v2(3255,3221) ; 3254.41,3204.41 v2(3255,3221) ; 3254.41,3204.41 v2(3255,3221) ; 3254.41,3204.41 3255,3205 ; 3255,3205 v2(3255,3221) ; 3255,3205 v2(3255,3221) ; 3255,3205 v2(3255,3221) ; 3255,3205 v2(3255,3221) ; v2(3255,3221) 4090,3221 ; 4090,3221 4755,3221 ; 4755,3221 J8.4@4785,3152 ; 4755,3221 4785,3191 ; J8.4@4785,3152 4785,3191 ; J8.4@4785,3152 4785,3191 ; 4785,3187.07 cw(c4749.93,3187.07) 4774.73,3162.27 ccw(c4749.93,3187.07) 4785,3187.07 ; 4785,3187.07 ccw(c4820.07,3187.07) 4795.27,3162.27 cw(c4820.07,3187.07) 4785,3187.07
VD: J3.8 J12.8 | length 112
  Top Layer w20: J3.8@4085,1635 J12.8@4085,1747
VDD3V3: 
VIN: J6.3 POWER.1 R25.2 | length 2272.6
  Top Layer w10: J6.3@2729,2473 2804,2473 2869,2538 3093,2538 3109.67,2554.67 R25.2@3109.67,2606.6 ; J6.3@2730.77,2458.58 2788.53,2473 ; J6.3@2730.77,2487.42 2788.53,2473 ; J6.3@2734.05,2449 2788.53,2473 ; J6.3@2734.05,2497 2788.53,2473 ; J6.3@2739.27,2462.73 cw(c2764.07,2437.93) 2764.07,2473 cw(c2764.07,2508.07) J6.3@2739.27,2483.27 ; J6.3@2746.34,2455.66 cw(c2788.21,2413.79) 2788.21,2473 cw(c2788.21,2532.21) J6.3@2746.34,2490.34 ; R25.2@3102.07,2599 cw(c3083.72,2580.65) 3109.67,2580.65 cw(c3135.62,2580.65) R25.2@3117.27,2599
  Top Layer w30: POWER.1@2418,3397 POWER.1@2595.17,3397 ; 2481.54,3397 POWER.1@2595.17,3397 ; J6.3@2729,2473 2794,2538 2794,2615 2646,2763 2646,3346.17 POWER.1@2595.17,3397 ; J6.3@2729,2487.53 ccw(c2729,2522.6) 2753.8,2497.8 ccw(c2778.6,2473) J6.3@2743.53,2473
VM: J5.1 J6.4 U3.10 | length 4315.2
  Top Layer w35: J5.1@2489,2616 2532,2573 J6.4@2729,2573 2594.47,2573 ; U3.10@4540,2303.43 v2@4540,2198 ; U3.10@4540,2335.91 v2@4540,2198 ; v2(4534.41,2192.41) v2(4562,2192.41) ; v2(4534.41,2192.41) v2(4562,2192.41) ; v2(4534.41,2192.41) v2(4562,2192.41) ; v2(4534.41,2192.41) v2(4562,2192.41) ; v2(4534.41,2192.41) v2(4562,2192.41) ; v2(4534.41,2192.41) v2(4562,2192.41) ; v2(4534.41,2192.41) v2(4562,2192.41) ; v2(4534.41,2192.41) v2(4562,2192.41) ; v2(4534.41,2192.41) v2@4540,2198 ; v2@4540,2198 v2(4562,2192.41) ; v2@4540,2198 v2(4562,2192.41) ; v2@4540,2198 v2(4562,2192.41)
  Bottom Layer w35: J5.1@2477.09,2602.59 2596,2509 ; J5.1@2486.88,2598.19 cw(c2474.53,2494.51) 2556.57,2559.09 ; J5.1@2489,2598.07 cw(c2489,2554.77) 2519.61,2585.39 cw(c2550.23,2616) J5.1@2506.93,2616 ; J5.1@2489,2616 2596,2509 ; J5.1@2502.41,2627.91 2596,2509 ; J5.1@2506.81,2618.12 ccw(c2610.49,2630.47) 2545.91,2548.43 ; 4415.62,2192 v2(4534.41,2192.41) ; 2596,2509 2596,2236 2640,2192 v2@4562,2192 ; v2(4534.41,2192.41) v2@4562,2192 ; v2(4534.41,2192.41) 4443.21,2192 v2(4562,2192.41) ; v2(4534.41,2192.41) v2(4562,2192.41) ; v2(4534.41,2192.41) v2@4562,2192 ; v2(4534.41,2192.41) v2(4562,2192.41) ; v2@4562,2192 v2(4562,2192.41)
VS: 0.2 1.2 2.2 3.2 4.2 5.2 6.2 7.2 8.2 9.2 10.2 11.2 12.2 13.2 14.2 15.2 J5.3 J6.2 | length 13007.4
  Top Layer w30: J5.3@2489,2222.3 2639.7,2373 ; J6.2@2727.5,2388.4 cw(c2732.02,2341.89) 2765.07,2374.93 ; J6.2@2730.41,2358.54 cw(c2739.98,2259.99) 2810,2330 ; J6.2@2733.26,2359.11 cw(c2743.53,2325.58) 2759.98,2356.55 cw(c2776.42,2387.53) J6.2@2742.89,2377.26 ; 3.2@3096.47,2008 4.2@3216,2008 ; 3635.53,2008 7.2@3516,2008 ; 3652.47,2008 8.2@3772,2008 ; 8.2@3752.47,2008 9.2@3872,2008 ; 9.2@3852.47,2008 10.2@3972,2008 ; 10.2@3952.47,2008 11.2@4072,2008 ; 11.2@4089.47,2008 12.2@4209,2008 ; 12.2@4189.47,2008 13.2@4309,2008 ; 12.2@4191.53,2008 11.2@4072,2008 ; 13.2@4289.47,2008 14.2@4409,2008 ; 14.2@4389.47,2008 15.2@4509,2008 ; 2639.7,2373 J6.2@2729,2373 ; 2639.7,2373 J6.2@2729,2373 ; 2693.93,2373 cw(c2693.93,2337.93) 2718.73,2362.73 ccw(c2693.93,2337.93) 2693.93,2373 ; 2693.93,2373 ccw(c2693.93,2408.07) 2718.73,2383.27 cw(c2693.93,2408.07) 2693.93,2373 ; 2727,2008 0.2@2778,2008 ; 2727,2008 0.2@2778,2008 ; 2727,2008 2697,2038 2697,2140 2810,2253 2810,2330 ; J6.2@2729,2373 2767,2373 ; J6.2@2729,2373 2810,2330 ; J6.2@2729,2373 2767,2373 ; 2742.93,2008 cw(c2742.93,1972.93) 2767.73,1997.73 ccw(c2742.93,1972.93) 2742.93,2008 ; 2742.93,2008 ccw(c2742.93,2043.07) 2767.73,2018.27 cw(c2742.93,2043.07) 2742.93,2008 ; 2764.07,2373 cw(c2764.07,2408.07) 2739.27,2383.27 ccw(c2764.07,2408.07) 2764.07,2373 ; 2764.07,2373 ccw(c2764.07,2337.93) 2739.27,2362.73 cw(c2764.07,2337.93) 2764.07,2373 ; 2767,2373 2810,2330 ; 0.2@2778,2008 1.2@2878,2008 ; 0.2@2778,2008 1.2@2878,2008 ; 2813.07,2008 cw(c2813.07,2043.07) 2788.27,2018.27 ccw(c2813.07,2043.07) 2813.07,2008 ; 2813.07,2008 ccw(c2813.07,1972.93) 2788.27,1997.73 cw(c2813.07,1972.93) 2813.07,2008 ; 2842.93,2008 cw(c2842.93,1972.93) 2867.73,1997.73 ccw(c2842.93,1972.93) 2842.93,2008 ; 2842.93,2008 ccw(c2842.93,2043.07) 2867.73,2018.27 cw(c2842.93,2043.07) 2842.93,2008 ; 1.2@2878,2008 2.2@2978,2008 ; 1.2@2878,2008 2.2@2978,2008 ; 2913.07,2008 cw(c2913.07,2043.07) 2888.27,2018.27 ccw(c2913.07,2043.07) 2913.07,2008 ; 2913.07,2008 ccw(c2913.07,1972.93) 2888.27,1997.73 cw(c2913.07,1972.93) 2913.07,2008 ; 2942.93,2008 cw(c2942.93,1972.93) 2967.73,1997.73 ccw(c2942.93,1972.93) 2942.93,2008 ; 2942.93,2008 ccw(c2942.93,2043.07) 2967.73,2018.27 cw(c2942.93,2043.07) 2942.93,2008 ; 2.2@2978,2008 3.2@3078,2008 ; 2.2@2978,2008 3.2@3078,2008 ; 3013.07,2008 cw(c3013.07,2043.07) 2988.27,2018.27 ccw(c3013.07,2043.07) 3013.07,2008 ; 3013.07,2008 ccw(c3013.07,1972.93) 2988.27,1997.73 cw(c3013.07,1972.93) 3013.07,2008 ; 3042.93,2008 cw(c3042.93,1972.93) 3067.73,1997.73 ccw(c3042.93,1972.93) 3042.93,2008 ; 3042.93,2008 ccw(c3042.93,2043.07) 3067.73,2018.27 cw(c3042.93,2043.07) 3042.93,2008 ; 3.2@3078,2008 4.2@3228,2008 ; 3113.07,2008 cw(c3113.07,2043.07) 3088.27,2018.27 ccw(c3113.07,2043.07) 3113.07,2008 ; 3113.07,2008 ccw(c3113.07,1972.93) 3088.27,1997.73 cw(c3113.07,1972.93) 3113.07,2008 ; 3180.93,2008 cw(c3180.93,1972.93) 3205.73,1997.73 ccw(c3180.93,1972.93) 3180.93,2008 ; 3180.93,2008 ccw(c3180.93,2043.07) 3205.73,2018.27 cw(c3180.93,2043.07) 3180.93,2008 ; 4.2@3216,2008 5.2@3316,2008 ; 4.2@3216,2008 5.2@3328,2008 ; 4.2@3226.27,1997.73 cw(c3251.07,1972.93) 3251.07,2008 ; 4.2@3226.27,1997.73 cw(c3251.07,1972.93) 3251.07,2008 ; 4.2@3226.27,1997.73 cw(c3251.07,1972.93) 3251.07,2008 ; 4.2@3226.27,1997.73 cw(c3251.07,1972.93) 3251.07,2008 ; 4.2@3226.27,2018.27 ccw(c3251.07,2043.07) 3251.07,2008 ; 4.2@3226.27,2018.27 ccw(c3251.07,2043.07) 3251.07,2008 ; 4.2@3226.27,2018.27 ccw(c3251.07,2043.07) 3251.07,2008 ; 4.2@3226.27,2018.27 ccw(c3251.07,2043.07) 3251.07,2008 ; 4.2@3228,2008 5.2@3316,2008 ; 4.2@3228,2008 5.2@3328,2008 ; 3280.93,2008 cw(c3280.93,1972.93) 5.2@3305.73,1997.73 ; 3280.93,2008 ccw(c3280.93,2043.07) 5.2@3305.73,2018.27 ; 3280.93,2008 cw(c3280.93,1972.93) 5.2@3305.73,1997.73 ; 3280.93,2008 ccw(c3280.93,2043.07) 5.2@3305.73,2018.27 ; 3280.93,2008 cw(c3280.93,1972.93) 5.2@3305.73,1997.73 ; 3280.93,2008 ccw(c3280.93,2043.07) 5.2@3305.73,2018.27 ; 3280.93,2008 cw(c3280.93,1972.93) 5.2@3305.73,1997.73 ; 3280.93,2008 ccw(c3280.93,2043.07) 5.2@3305.73,2018.27 ; 5.2@3316,2008 6.2@3416,2008 ; 5.2@3316,2008 6.2@3428,2008 ; 5.2@3326.27,1997.73 cw(c3351.07,1972.93) 3351.07,2008 ; 5.2@3326.27,1997.73 cw(c3351.07,1972.93) 3351.07,2008 ; 5.2@3326.27,1997.73 cw(c3351.07,1972.93) 3351.07,2008 ; 5.2@3326.27,1997.73 cw(c3351.07,1972.93) 3351.07,2008 ; 5.2@3326.27,2018.27 ccw(c3351.07,2043.07) 3351.07,2008 ; 5.2@3326.27,2018.27 ccw(c3351.07,2043.07) 3351.07,2008 ; 5.2@3326.27,2018.27 ccw(c3351.07,2043.07) 3351.07,2008 ; 5.2@3326.27,2018.27 ccw(c3351.07,2043.07) 3351.07,2008 ; 5.2@3328,2008 6.2@3416,2008 ; 5.2@3328,2008 6.2@3428,2008 ; 3380.93,2008 cw(c3380.93,1972.93) 6.2@3405.73,1997.73 ; 3380.93,2008 ccw(c3380.93,2043.07) 6.2@3405.73,2018.27 ; 3380.93,2008 cw(c3380.93,1972.93) 6.2@3405.73,1997.73 ; 3380.93,2008 ccw(c3380.93,2043.07) 6.2@3405.73,2018.27 ; 3380.93,2008 cw(c3380.93,1972.93) 6.2@3405.73,1997.73 ; 3380.93,2008 ccw(c3380.93,2043.07) 6.2@3405.73,2018.27 ; 3380.93,2008 cw(c3380.93,1972.93) 6.2@3405.73,1997.73 ; 3380.93,2008 ccw(c3380.93,2043.07) 6.2@3405.73,2018.27 ; 6.2@3416,2008 7.2@3516,2008 ; 6.2@3416,2008 7.2@3528,2008 ; 6.2@3426.27,1997.73 cw(c3451.07,1972.93) 3451.07,2008 ; 6.2@3426.27,1997.73 cw(c3451.07,1972.93) 3451.07,2008 ; 6.2@3426.27,1997.73 cw(c3451.07,1972.93) 3451.07,2008 ; 6.2@3426.27,1997.73 cw(c3451.07,1972.93) 3451.07,2008 ; 6.2@3426.27,2018.27 ccw(c3451.07,2043.07) 3451.07,2008 ; 6.2@3426.27,2018.27 ccw(c3451.07,2043.07) 3451.07,2008 ; 6.2@3426.27,2018.27 ccw(c3451.07,2043.07) 3451.07,2008 ; 6.2@3426.27,2018.27 ccw(c3451.07,2043.07) 3451.07,2008 ; 6.2@3428,2008 7.2@3516,2008 ; 6.2@3428,2008 7.2@3528,2008 ; 3480.93,2008 cw(c3480.93,1972.93) 7.2@3505.73,1997.73 ; 3480.93,2008 ccw(c3480.93,2043.07) 7.2@3505.73,2018.27 ; 3480.93,2008 cw(c3480.93,1972.93) 7.2@3505.73,1997.73 ; 3480.93,2008 ccw(c3480.93,2043.07) 7.2@3505.73,2018.27 ; 3480.93,2008 cw(c3480.93,1972.93) 7.2@3505.73,1997.73 ; 3480.93,2008 ccw(c3480.93,2043.07) 7.2@3505.73,2018.27 ; 3480.93,2008 cw(c3480.93,1972.93) 7.2@3505.73,1997.73 ; 3480.93,2008 ccw(c3480.93,2043.07) 7.2@3505.73,2018.27 ; 7.2@3528,2008 3728,2008 ; 3551.07,2008 cw(c3551.07,2043.07) 3526.27,2018.27 ccw(c3551.07,2043.07) 3551.07,2008 ; 3551.07,2008 ccw(c3551.07,1972.93) 3526.27,1997.73 cw(c3551.07,1972.93) 3551.07,2008 ; 3728,2008 8.2@3772,2008 ; 3728,2008 8.2@3772,2008 ; 3728,2008 3828,2008 ; 3736.93,2008 cw(c3736.93,1972.93) 8.2@3761.73,1997.73 ; 3736.93,2008 ccw(c3736.93,2043.07) 8.2@3761.73,2018.27 ; 3736.93,2008 cw(c3736.93,1972.93) 8.2@3761.73,1997.73 ; 3736.93,2008 ccw(c3736.93,2043.07) 8.2@3761.73,2018.27 ; 3736.93,2008 cw(c3736.93,1972.93) 8.2@3761.73,1997.73 ; 3736.93,2008 ccw(c3736.93,2043.07) 8.2@3761.73,2018.27 ; 3736.93,2008 cw(c3736.93,1972.93) 8.2@3761.73,1997.73 ; 3736.93,2008 ccw(c3736.93,2043.07) 8.2@3761.73,2018.27 ; 3736.93,2008 cw(c3736.93,1972.93) 8.2@3761.73,1997.73 ; 3736.93,2008 ccw(c3736.93,2043.07) 8.2@3761.73,2018.27 ; 3736.93,2008 cw(c3736.93,1972.93) 8.2@3761.73,1997.73 ; 3736.93,2008 ccw(c3736.93,2043.07) 8.2@3761.73,2018.27 ; 8.2@3772,2008 9.2@3872,2008 ; 8.2@3782.27,1997.73 cw(c3807.07,1972.93) 3807.07,2008 ; 8.2@3782.27,1997.73 cw(c3807.07,1972.93) 3807.07,2008 ; 8.2@3782.27,1997.73 cw(c3807.07,1972.93) 3807.07,2008 ; 8.2@3782.27,2018.27 ccw(c3807.07,2043.07) 3807.07,2008 ; 8.2@3782.27,2018.27 ccw(c3807.07,2043.07) 3807.07,2008 ; 8.2@3782.27,2018.27 ccw(c3807.07,2043.07) 3807.07,2008 ; 3828,2008 9.2@3872,2008 ; 3828,2008 9.2@3872,2008 ; 3828,2008 3928,2008 ; 3836.93,2008 cw(c3836.93,1972.93) 9.2@3861.73,1997.73 ; 3836.93,2008 ccw(c3836.93,2043.07) 9.2@3861.73,2018.27 ; 3836.93,2008 cw(c3836.93,1972.93) 9.2@3861.73,1997.73 ; 3836.93,2008 ccw(c3836.93,2043.07) 9.2@3861.73,2018.27 ; 3836.93,2008 cw(c3836.93,1972.93) 9.2@3861.73,1997.73 ; 3836.93,2008 ccw(c3836.93,2043.07) 9.2@3861.73,2018.27 ; 3836.93,2008 cw(c3836.93,1972.93) 9.2@3861.73,1997.73 ; 3836.93,2008 ccw(c3836.93,2043.07) 9.2@3861.73,2018.27 ; 3836.93,2008 cw(c3836.93,1972.93) 9.2@3861.73,1997.73 ; 3836.93,2008 ccw(c3836.93,2043.07) 9.2@3861.73,2018.27 ; 3836.93,2008 cw(c3836.93,1972.93) 9.2@3861.73,1997.73 ; 3836.93,2008 ccw(c3836.93,2043.07) 9.2@3861.73,2018.27 ; 3836.93,2008 cw(c3836.93,1972.93) 9.2@3861.73,1997.73 ; 3836.93,2008 ccw(c3836.93,2043.07) 9.2@3861.73,2018.27 ; 9.2@3872,2008 10.2@3972,2008 ; 9.2@3882.27,1997.73 cw(c3907.07,1972.93) 3907.07,2008 ; 9.2@3882.27,1997.73 cw(c3907.07,1972.93) 3907.07,2008 ; 9.2@3882.27,1997.73 cw(c3907.07,1972.93) 3907.07,2008 ; 9.2@3882.27,2018.27 ccw(c3907.07,2043.07) 3907.07,2008 ; 9.2@3882.27,2018.27 ccw(c3907.07,2043.07) 3907.07,2008 ; 9.2@3882.27,2018.27 ccw(c3907.07,2043.07) 3907.07,2008 ; 3928,2008 10.2@3972,2008 ; 3928,2008 10.2@3972,2008 ; 3928,2008 4028,2008 ; 3936.93,2008 cw(c3936.93,1972.93) 10.2@3961.73,1997.73 ; 3936.93,2008 ccw(c3936.93,2043.07) 10.2@3961.73,2018.27 ; 3936.93,2008 cw(c3936.93,1972.93) 10.2@3961.73,1997.73 ; 3936.93,2008 ccw(c3936.93,2043.07) 10.2@3961.73,2018.27 ; 3936.93,2008 cw(c3936.93,1972.93) 10.2@3961.73,1997.73 ; 3936.93,2008 ccw(c3936.93,2043.07) 10.2@3961.73,2018.27 ; 3936.93,2008 cw(c3936.93,1972.93) 10.2@3961.73,1997.73 ; 3936.93,2008 ccw(c3936.93,2043.07) 10.2@3961.73,2018.27 ; 3936.93,2008 cw(c3936.93,1972.93) 10.2@3961.73,1997.73 ; 3936.93,2008 ccw(c3936.93,2043.07) 10.2@3961.73,2018.27 ; 3936.93,2008 cw(c3936.93,1972.93) 10.2@3961.73,1997.73 ; 3936.93,2008 ccw(c3936.93,2043.07) 10.2@3961.73,2018.27 ; 3936.93,2008 cw(c3936.93,1972.93) 10.2@3961.73,1997.73 ; 3936.93,2008 ccw(c3936.93,2043.07) 10.2@3961.73,2018.27 ; 10.2@3972,2008 11.2@4072,2008 ; 10.2@3982.27,1997.73 cw(c4007.07,1972.93) 4007.07,2008 ; 10.2@3982.27,1997.73 cw(c4007.07,1972.93) 4007.07,2008 ; 10.2@3982.27,1997.73 cw(c4007.07,1972.93) 4007.07,2008 ; 10.2@3982.27,2018.27 ccw(c4007.07,2043.07) 4007.07,2008 ; 10.2@3982.27,2018.27 ccw(c4007.07,2043.07) 4007.07,2008 ; 10.2@3982.27,2018.27 ccw(c4007.07,2043.07) 4007.07,2008 ; 4028,2008 11.2@4072,2008 ; 4028,2008 11.2@4072,2008 ; 4028,2008 4180,2008 13.2@4280,2008 ; 4036.93,2008 cw(c4036.93,1972.93) 11.2@4061.73,1997.73 ; 4036.93,2008 ccw(c4036.93,2043.07) 11.2@4061.73,2018.27 ; 4036.93,2008 cw(c4036.93,1972.93) 11.2@4061.73,1997.73 ; 4036.93,2008 ccw(c4036.93,2043.07) 11.2@4061.73,2018.27 ; 4036.93,2008 cw(c4036.93,1972.93) 11.2@4061.73,1997.73 ; 4036.93,2008 ccw(c4036.93,2043.07) 11.2@4061.73,2018.27 ; 4036.93,2008 cw(c4036.93,1972.93) 11.2@4061.73,1997.73 ; 4036.93,2008 ccw(c4036.93,2043.07) 11.2@4061.73,2018.27 ; 4036.93,2008 cw(c4036.93,1972.93) 11.2@4061.73,1997.73 ; 4036.93,2008 ccw(c4036.93,2043.07) 11.2@4061.73,2018.27 ; 4036.93,2008 cw(c4036.93,1972.93) 11.2@4061.73,1997.73 ; 4036.93,2008 ccw(c4036.93,2043.07) 11.2@4061.73,2018.27 ; 4036.93,2008 cw(c4036.93,1972.93) 11.2@4061.73,1997.73 ; 4036.93,2008 ccw(c4036.93,2043.07) 11.2@4061.73,2018.27 ; 11.2@4082.27,1997.73 cw(c4107.07,1972.93) 4107.07,2008 ; 11.2@4082.27,1997.73 cw(c4107.07,1972.93) 4107.07,2008 ; 11.2@4082.27,1997.73 cw(c4107.07,1972.93) 4107.07,2008 ; 11.2@4082.27,2018.27 ccw(c4107.07,2043.07) 4107.07,2008 ; 11.2@4082.27,2018.27 ccw(c4107.07,2043.07) 4107.07,2008 ; 11.2@4082.27,2018.27 ccw(c4107.07,2043.07) 4107.07,2008 ; 4173.93,2008 cw(c4173.93,1972.93) 12.2@4198.73,1997.73 ; 4173.93,2008 ccw(c4173.93,2043.07) 12.2@4198.73,2018.27 ; 4173.93,2008 cw(c4173.93,1972.93) 12.2@4198.73,1997.73 ; 4173.93,2008 ccw(c4173.93,2043.07) 12.2@4198.73,2018.27 ; 4173.93,2008 cw(c4173.93,1972.93) 12.2@4198.73,1997.73 ; 4173.93,2008 ccw(c4173.93,2043.07) 12.2@4198.73,2018.27 ; 12.2@4209,2008 13.2@4309,2008 ; 12.2@4209,2008 13.2@4280,2008 ; 12.2@4219.27,1997.73 cw(c4244.07,1972.93) 4244.07,2008 ; 12.2@4219.27,1997.73 cw(c4244.07,1972.93) 4244.07,2008 ; 12.2@4219.27,1997.73 cw(c4244.07,1972.93) 4244.07,2008 ; 12.2@4219.27,1997.73 cw(c4244.07,1972.93) 4244.07,2008 ; 12.2@4219.27,2018.27 ccw(c4244.07,2043.07) 4244.07,2008 ; 12.2@4219.27,2018.27 ccw(c4244.07,2043.07) 4244.07,2008 ; 12.2@4219.27,2018.27 ccw(c4244.07,2043.07) 4244.07,2008 ; 12.2@4219.27,2018.27 ccw(c4244.07,2043.07) 4244.07,2008 ; 4273.93,2008 cw(c4273.93,1972.93) 13.2@4298.73,1997.73 ; 4273.93,2008 ccw(c4273.93,2043.07) 13.2@4298.73,2018.27 ; 4273.93,2008 cw(c4273.93,1972.93) 13.2@4298.73,1997.73 ; 4273.93,2008 ccw(c4273.93,2043.07) 13.2@4298.73,2018.27 ; 4273.93,2008 cw(c4273.93,1972.93) 13.2@4298.73,1997.73 ; 4273.93,2008 ccw(c4273.93,2043.07) 13.2@4298.73,2018.27 ; 4273.93,2008 cw(c4273.93,1972.93) 13.2@4298.73,1997.73 ; 4273.93,2008 ccw(c4273.93,2043.07) 13.2@4298.73,2018.27 ; 13.2@4280,2008 14.2@4380,2008 ; 13.2@4309,2008 14.2@4409,2008 ; 13.2@4309,2008 14.2@4380,2008 ; 13.2@4319.27,1997.73 cw(c4344.07,1972.93) 4344.07,2008 ; 13.2@4319.27,1997.73 cw(c4344.07,1972.93) 4344.07,2008 ; 13.2@4319.27,1997.73 cw(c4344.07,1972.93) 4344.07,2008 ; 13.2@4319.27,1997.73 cw(c4344.07,1972.93) 4344.07,2008 ; 13.2@4319.27,2018.27 ccw(c4344.07,2043.07) 4344.07,2008 ; 13.2@4319.27,2018.27 ccw(c4344.07,2043.07) 4344.07,2008 ; 13.2@4319.27,2018.27 ccw(c4344.07,2043.07) 4344.07,2008 ; 13.2@4319.27,2018.27 ccw(c4344.07,2043.07) 4344.07,2008 ; 4373.93,2008 cw(c4373.93,1972.93) 14.2@4398.73,1997.73 ; 4373.93,2008 ccw(c4373.93,2043.07) 14.2@4398.73,2018.27 ; 4373.93,2008 cw(c4373.93,1972.93) 14.2@4398.73,1997.73 ; 4373.93,2008 ccw(c4373.93,2043.07) 14.2@4398.73,2018.27 ; 4373.93,2008 cw(c4373.93,1972.93) 14.2@4398.73,1997.73 ; 4373.93,2008 ccw(c4373.93,2043.07) 14.2@4398.73,2018.27 ; 4373.93,2008 cw(c4373.93,1972.93) 14.2@4398.73,1997.73 ; 4373.93,2008 ccw(c4373.93,2043.07) 14.2@4398.73,2018.27 ; 14.2@4380,2008 15.2@4509,2008 ; 14.2@4409,2008 15.2@4509,2008 ; 14.2@4409,2008 15.2@4509,2008 ; 14.2@4419.27,1997.73 cw(c4444.07,1972.93) 4444.07,2008 ; 14.2@4419.27,1997.73 cw(c4444.07,1972.93) 4444.07,2008 ; 14.2@4419.27,1997.73 cw(c4444.07,1972.93) 4444.07,2008 ; 14.2@4419.27,1997.73 cw(c4444.07,1972.93) 4444.07,2008 ; 14.2@4419.27,2018.27 ccw(c4444.07,2043.07) 4444.07,2008 ; 14.2@4419.27,2018.27 ccw(c4444.07,2043.07) 4444.07,2008 ; 14.2@4419.27,2018.27 ccw(c4444.07,2043.07) 4444.07,2008 ; 14.2@4419.27,2018.27 ccw(c4444.07,2043.07) 4444.07,2008 ; 4473.93,2008 cw(c4473.93,1972.93) 15.2@4498.73,1997.73 ; 4473.93,2008 ccw(c4473.93,2043.07) 15.2@4498.73,2018.27 ; 4473.93,2008 cw(c4473.93,1972.93) 15.2@4498.73,1997.73 ; 4473.93,2008 ccw(c4473.93,2043.07) 15.2@4498.73,2018.27 ; 4473.93,2008 cw(c4473.93,1972.93) 15.2@4498.73,1997.73 ; 4473.93,2008 ccw(c4473.93,2043.07) 15.2@4498.73,2018.27 ; 4473.93,2008 cw(c4473.93,1972.93) 15.2@4498.73,1997.73 ; 4473.93,2008 ccw(c4473.93,2043.07) 15.2@4498.73,2018.27
pads on no net: J3.1 J3.2 J12.1 J12.2 POWER.3
copper on no net: | length 444.4
  Top Layer w30: 3485,1670.07 cw(c3449.93,1670.07) 3474.73,1645.27 ccw(c3449.93,1670.07) 3485,1670.07 ; 3485,1670.07 ccw(c3520.07,1670.07) 3495.27,1645.27 cw(c3520.07,1670.07) 3485,1670.07 ; 3485,1711.93 cw(c3520.07,1711.93) 3495.27,1736.73 ccw(c3520.07,1711.93) 3485,1711.93 ; 3485,1711.93 ccw(c3449.93,1711.93) 3474.73,1736.73 cw(c3449.93,1711.93) 3485,1711.93 ; 3485,1635 3485,1747 3485,1635

## Polygon pours and split planes (outlines as drawn)
GND on Top Layer "Bottom Layer-No Net" (solid, remove dead copper, pour order 4): 2306,3599 2317,3610 2317,3612 4815,3612 4862,3565 4862,3115 4863,3115 4964,3014 4962,3012 4962,1745 4962,1741 4863,1642 4864,1641 4864,1567 4863,1567 4853,1557 4851,1559 2320,1559 2317,1559 2307,1569
GND on Bottom Layer "Bottom Layer-No Net" (solid, remove dead copper, pour order 6): 2320,1557 2309,1568 2307,1568 2307,3603 2319,3615 2321,3613 4814,3613 4820,3613 4862,3571 4860,3569 4860,3119 4959,3020 4961,3018 4961,1743 4961,1740 4864,1643 4862,1641 4862,1570 4850,1558

## Keep-outs
Keep-Out Layer:
  lines w10: 2285,1574.37 ccw(c2324.37,1574.37) 2324.37,1535 4845.63,1535 ccw(c4845.63,1574.37) 4885,1574.37 4885,1635 4985,1735 4985,3025 4885,3125 4885,3575 4825,3635 2324.37,3635 ccw(c2324.37,3595.63) 2285,3595.63 2285,1574.37 ; 5618,3400.37 ccw(c5657.37,3400.37) 5657.37,3361 8178.63,3361 ccw(c8178.63,3400.37) 8218,3400.37 8218,3461 8318,3561 8318,4851 8218,4951 8218,5401 8158,5461 5657.37,5461 ccw(c5657.37,5421.63) 5618,5421.63 5618,3400.37 ; 5620,1300.37 ccw(c5659.37,1300.37) 5659.37,1261 8180.63,1261 ccw(c8180.63,1300.37) 8220,1300.37 8220,1361 8320,1461 8320,2751 8220,2851 8220,3301 8160,3361 5659.37,3361 ccw(c5659.37,3321.63) 5620,3321.63 5620,1300.37
  text "拼版格式" at 5335,4814 h60 r358

## Silkscreen, mask and mechanical layers (free items; w line width, h text height)
Top Overlay:
  text "PWMA" at 3808,3378 h60 r270
  text "DIRA" at 3907,3378 h60 r270
  text "DIRB" at 4064,3378 h60 r270
  text "PWMB" at 4168,3378 h60 r270
  text "5" at 4268,3340.15 h60
  text "3" at 4473,3340 h60
  text "2" at 4574,3340 h60
  text "0" at 4772,3340 h60
  text "13" at 3399,3339.45 h60
  text "12" at 3499,3339.45 h60
  text "11" at 3599,3339.45 h60
  text "10" at 3699,3339.45 h60
  text "4" at 4368,3339.45 h60
  text "1" at 4674,3339.45 h60
  text "SDA" at 3083,3337 h60
  text "ARef" at 3215,3337 h60
  text "SCL" at 2973,3336 h60
  text "GND" at 4633,3217 h60
  text "5V" at 4754,3217 h60
  text "TX" at 4453,3216.3 h60
  text "RX" at 4553,3216.3 h60
  text "www.doit.am" at 3363,3137 h100
  text "IN:6-18V" at 2403,2742 h70
  text "DC-MOTOR" at 4639,2734 h60
  text "VM" at 2313.64,2659 h60 r270
  text "B+" at 4938,2646 h60 r270
  text "VM" at 2783,2616 h60 r270
  text "VIN" at 2783,2519 h60 r270
  text "GND" at 2313,2469 h60 r270
  text "B-" at 4938,2431.27 h60 r270
  text "VS" at 2783.7,2405 h60 r270
  text "5V" at 2783.7,2307 h60 r270
  text "VS" at 2313,2264 h60 r270
  text "A+" at 4938,2252.73 h60 r270
  text "PWM" at 3588,2090 h60
  text "GND" at 2313,2085 h60 r270
  text "A-" at 4938,2047 h60 r270
  text "VS" at 3610,1989.85 h60
  text "GND" at 3591,1889 h60
  text "0" at 4271,1793 h60
  text "3" at 4571,1793 h60
  text "5" at 4771,1793 h60
  text "1" at 4371,1792.3 h60
  text "2" at 4471,1792.3 h60
  text "4" at 4671,1792.3 h60
  text "3V3" at 3638,1790 h60
  text "5V" at 3750,1790 h60
  text "GND" at 3883,1790 h60
  text "VIN" at 4041,1789.3 h60
  text "2 Motor &&16 Servo" at 2453,1712 h94.49
  text "Drive       Board" at 2545,1620 h94.49

## Dimensions
4845.63,1535 to 4825,3635 on Keep-Out Layer
2285,1574.37 to 4985,1735 on Keep-Out Layer